# Altium PCB DC-DC switching regulators.PcbDoc
Units mm, origin at the board's own origin, x right, y up, seen from the top; angles counter-clockwise.
Board outline 26 x 20 mm, 3 copper layers (Top Layer, Mid-Layer 1, Bottom Layer); 16 components, 8 nets, 37 pads, 6 vias.
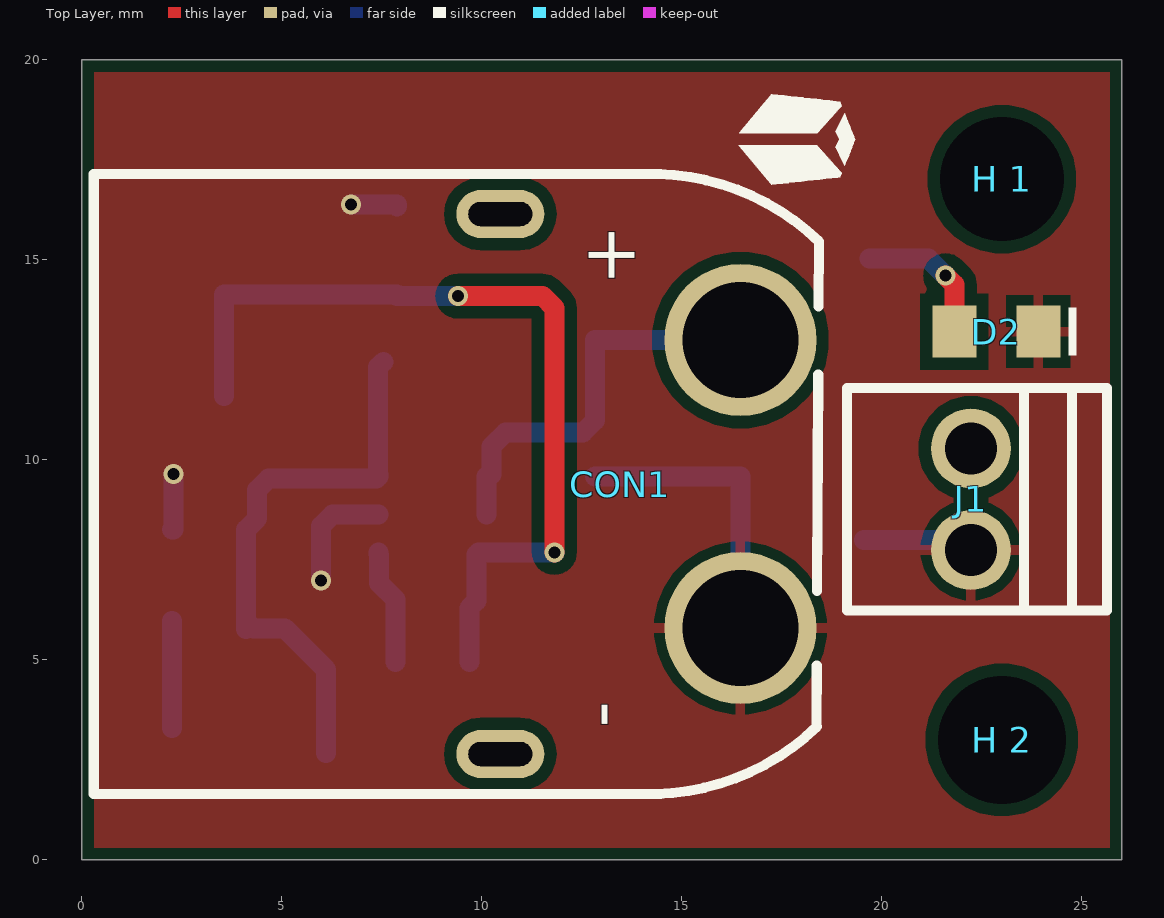
[diagram p0: Top Layer view]
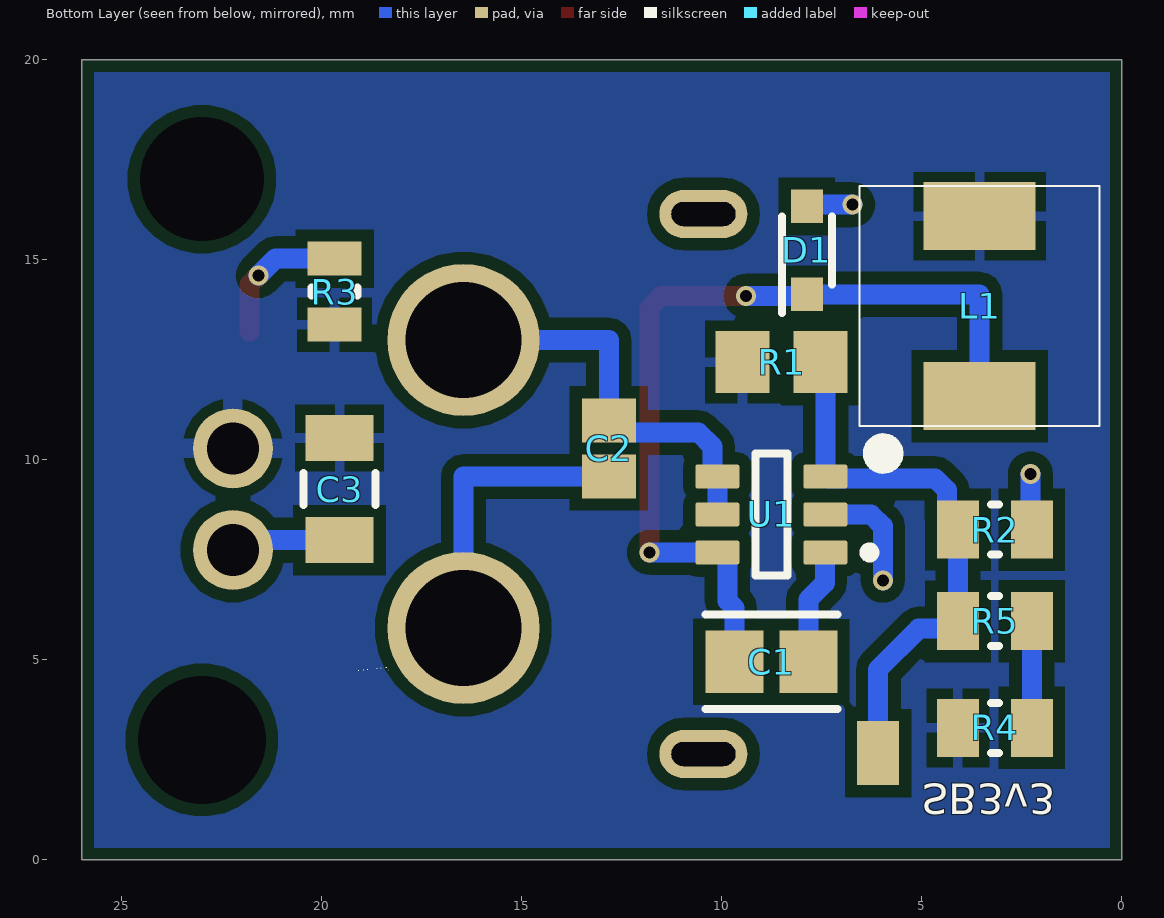
[diagram p1: Bottom Layer view, seen from below]

## Layer stack, top to bottom
Top Solder: solder mask 0.0102, Solder Resist, Dk 3.5
Top Layer: signal copper 0.0356
Dielectric 1: dielectric 0.32, FR-4, Dk 4.8
Mid-Layer 1: signal copper 0.0356
Dielectric2: dielectric 0.32, FR-4, Dk 4.8
Bottom Layer: signal copper 0.0356
Bottom Solder: solder mask 0.0102, Solder Resist, Dk 3.5

## Board outline
0,0 0,20 26,20 26,0

## Design rules (kind name [scope] priority, off if disabled: settings)
BoardOutlineClearance [All] p1: gap=0.3 ignorepadtopadclearanceinfootprint=FALSE
Clearance [All] p1: gap=0.3 ignorepadtopadclearanceinfootprint=TRUE
HoleSize [All] p1: absolutevalues=TRUE maxlimit=6.3 minlimit=0.3 maxpercent=80.000 minpercent=20.000
HoleToHoleClearance [All] p1: gap=0.5 allowstackedmicrovias=TRUE
PolygonConnect [All vs IsNamedPolygon('GND')] p1: thpad.connectstyle=Relief thpad.reliefconductorwidth=0.254 thpad.reliefentries=4 thpad.polygonreliefangle="90 Angle" thpad.airgapwidth=0.254 smdpad.connectstyle=Relief smdpad.reliefconductorwidth=0.254 smdpad.reliefentries=4 smdpad.polygonreliefangle="90 Angle" smdpad.airgapwidth=0.254 via.connectstyle=Direct via.reliefconductorwidth=0.254 via.reliefentries=4 via.polygonreliefangle="90 Angle" via.airgapwidth=0.254
PolygonConnect GND_NET [All vs IsNamedPolygon('Vo+')] p2: thpad.connectstyle=Relief thpad.reliefconductorwidth=0.5 thpad.reliefentries=4 thpad.polygonreliefangle="90 Angle" thpad.airgapwidth=0.254 smdpad.connectstyle=Relief smdpad.reliefconductorwidth=0.254 smdpad.reliefentries=4 smdpad.polygonreliefangle="90 Angle" smdpad.airgapwidth=0.254 via.connectstyle=Direct via.reliefconductorwidth=0.254 via.reliefentries=4 via.polygonreliefangle="90 Angle" via.airgapwidth=0.254
PolygonConnect PolygonConnect_1 [All] p3: connectstyle=Relief reliefconductorwidth=0.254 reliefentries=4 polygonreliefangle="90 Angle" airgapwidth=0.254
RoutingVias [All] p1: holewidth=0.3 width=0.5 viastyle="Through Hole" minholewidth=0.3 minwidth=0.5 maxholewidth=0.3 maxwidth=0.5
SilkToSilkClearance [All] p1 off: silktosilkclearance=0.254
SilkToSolderMaskClearance [IsPad] p1 off: minsilkscreentomaskgap=0.254 clearancetoexposedcopper=TRUE
SolderMaskExpansion [All] p1: expansion=0.102 istentingtop=FALSE
SupplyNets "Schematic Supply Nets" [InNet('GND')] p1: voltage=0.000
Width [All] p1: maxlimit=2.032 minlimit=0.254 preferedwidth=0.762
26 further rules are at their usual default settings.

## Components (designator, comment, footprint, x,y, rotation, side; value= is the part's Value field where it differs from the comment)
C1 "1uF" FP-CL21-IPC_A 8.763,4.953 r0 bottom
C2 "2.2uF" CAPC2013X145X50LL20T25 12.827,10.287 r90 bottom
C3 "4.7uF" FP-GRM31C-0_2-e0_3_0_8-IPC_C 19.558,9.271 r270 bottom
CON1 "XT60PW-M" XT60PW-M 13.462,9.398 r0 top
D1 "60V 1A" SODFL2512X80N 7.874,15.24 r90 bottom
D2 "LED Green" WL-SMCW_0805_150080xx75000 22.86,13.208 r180 top
"H 1" "M3" M3#1 26.19,17.411 r0 top
"H 2" "M3" M3#2 26.19,2.54 r0 top
J1 "CON" XY308-2.54-2P 22.225,9.017 r270 top
L1 "15uH" CMLW6020S150MST 3.556,13.843 r90 bottom
R1 "5.62k" RESC2013X70X40ML20T20 8.509,12.446 r0 bottom
R2 "1.02k" RESC2013X50X30NL20T20 3.175,8.255 r0 bottom
R3 "470" RESC2013X50X30LL20T20 19.685,14.205 r270 bottom
R4 "0Ohm" RESC2013X50X30NL20T20 3.175,3.302 r180 bottom
R5 "1.02k" RESC2013X50X30NL20T20 3.175,5.969 r0 bottom
U1 "LMR14206XMKE/NOPB" FP-DDC0006A-MFG 8.763,8.636 r0 bottom

## Footprints (in the part's own frame and the unit in brackets; to place one, negate y for a bottom-side part, rotate by r counter-clockwise, add the part's x,y. Pads: shape width x height; smd on the part's side, far side on the other; paste and mask are expansions set on the pad)
CAPC2013X145X50LL20T25 [mm] "Chip Capacitor, 2-Leads, Body 2.00x1.25mm, IPC High Density"
  rect 1.1x1.35 smd mask+0: 1(-0.7,0) 2(0.7,0)
  body extent -1.1,-0.72 1.1,0.72, height 1.45
CMLW6020S150MST [mm]
  rect 1.7x2.8 smd: 1(-2.25,0) 2(2.25,0)
  silkscreen extent -4.14,-3 3,3, body extent -3,-3 3,3, height 2
FP-CL21-IPC_A [mm]
  rect 1.455x1.556 smd paste+0 mask+0: 1(-0.926,0) 2(0.926,0)
  silkscreen extent -1.65,-1.18 1.65,1.18, body extent -1,-0.63 1,0.63, height 1.45
FP-DDC0006A-MFG [mm]
  rrect17% 1.1x0.6 smd paste+0 mask+0: 1(-1.35,0.95) 2(-1.35,0) 3(-1.35,-0.95) 4(1.35,-0.95) 5(1.35,0) 6(1.35,0.95)
  silkscreen extent -2.57,-1.53 0.4,1.53, body extent -1.4,-1.45 1.4,1.45, height 1.1
FP-GRM31C-0_2-e0_3_0_8-IPC_C [mm]
  rect 1.155x1.706 smd paste+0 mask+0: 1(-1.276,0) 2(1.276,0)
  silkscreen extent -0.4,-0.9 0.4,0.9, body extent -1.6,-0.8 1.6,0.8, height 1.8
M3#1 [mm] "M3 drill hole"
  round 0 hole 3.1 unplated mask+0: 1(-3.19,-0.393)
M3#2 [mm] "M3 drill hole"
  round 0 hole 3.2 unplated paste+0 mask+0: 1(-3.19,0.46)
RESC2013X50X30LL20T20 [mm] "Chip Resistor, 2-Leads, Body 2.00x1.25mm, IPC High Density"
  rect 0.85x1.35 smd: 1(-0.825,0) 2(0.825,0)
  silkscreen extent -0.1,-0.58 0.1,0.58, body extent -1.1,-0.72 1.1,0.72, height 0.5
RESC2013X50X30NL20T20 [mm] "Chip Resistor, 2-Leads, Body 2.00x1.25mm, IPC Medium Density"
  rect 1.05x1.45 smd: 1(-0.925,0) 2(0.925,0)
  silkscreen extent -0.1,-0.63 0.1,0.63, body extent -1.1,-0.72 1.1,0.72, height 0.5
RESC2013X70X40ML20T20 [mm] "Chip Resistor, 2-Leads, Body 2.00x1.25mm, IPC Low Density"
  rect 1.35x1.55 smd: 1(-0.975,0) 2(0.975,0)
  body extent -1.1,-0.72 1.1,0.72, height 0.7
SODFL2512X80N [mm]
  rect 0.84x0.8 smd: 1(-1.1,0) 2(1.1,0)
  silkscreen extent -1.57,-0.63 0.85,0.63, body extent -1.25,-0.63 1.25,0.62, height 0.71
WL-SMCW_0805_150080xx75000 [mm] "SMD Mono-color Chip LED, body 2.0x1.25mm"
  rect 1.1x1.3 smd: 1(-1.05,0) 2(1.05,0)
  silkscreen extent -2,-0.6 -1.8,0.6, body extent -1,-0.63 1,0.62, height 0.7
XT60PW-M [mm]
  round 3.8 hole 2.9 paste-2539.97 mask+0.05: 1(3,-3.6) 2(3,3.6)
  oval 2.2x1.2 hole 0.6 slot 1.6 at 0 deg paste-2539.97 mask+0.05: 3(-3,6.75) 4(-3,-6.75)
  silkscreen extent -13.17,-7.75 4.96,7.75
XY308-2.54-2P [mm] "1x2P 6A 150V Green 18~26 Straight 2.54mm 1 1 2 Plugin,P=2.54mm Screw terminal ROHS"
  round 2 hole 1.3 paste-2539.97 mask+0.051: 1(-1.27,0) 2(1.27,0)
  silkscreen extent -2.78,-3.1 2.78,3.4

## Part data
C1: library part CMP-13271-003098-1, "50V 1uF X7R ±10% 0805 Multilayer Ceramic Capacitors MLCC - SMD/SMT ROHS", Case Code (Imperial)=0805, Case Code (Metric)=2012, Dielectric=X7R, JLCPCB Part #=C28323, Max Operating Temperature=125°C, Min Operating Temperature=-55°C, Package Quantity=1, Tolerance=10%, Voltage=16V, Capacitance=1uF, Case/Package=0805, ComponentLink1Description=Datasheet, ComponentLink1URL=https://wmsc.lcsc.com/wmsc/upload/file/pdf/v2/lcsc/2304140030_Samsung-Electro-Mechanics-CL21B105KBFNNNE_C28323.pdf, ComponentLink2Description=JCLPCB, ComponentLink2URL=https://jlcpcb.com/partdetail/29074-CL21B105KBFNNNE/C28323, Contact Plating=Tin, Depth=1.25mm, Height=1.25mm, Lead Free="Lead Free", Length=2mm, Mount="Surface Mount", Package=0805, Packaging="Tape and Reel", Radiation Hardening=No, Thickness=0.053inch, Voltage Rating=16V, Voltage Rating (DC)=16V, Width=0.049inch
C2: library part CMP-2007-01169-1, "25V 2.2uF X7R ±10% 0805 Multilayer Ceramic Capacitors MLCC - SMD/SMT ROHS", JLCPCB Part #=C19110, Manufacturer="Samsung Electro-Mechanics", Package=0805, Part Number=C0805C225K4RAC7800, ComponentLink1Description=Datasheet, ComponentLink1URL=https://wmsc.lcsc.com/wmsc/upload/file/pdf/v2/lcsc/2304140030_Samsung-Electro-Mechanics-CL21B225KAFNNNE_C19110.pdf, ComponentLink2Description=JLCPCB, ComponentLink2URL=https://jlcpcb.com/partdetail/19814-CL21B225KAFNNNE/C19110
C3: library part CMP-1037-04923-3, "50V 4.7uF X7R ±10% 1206 Multilayer Ceramic Capacitors MLCC - SMD/SMT ROHS", Case Code (Imperial)=1206, Case Code (Metric)=3216, Dielectric=X7R, JLCPCB Part #=C51205, Max Operating Temperature=125°C, MFR.Part #=CL31B475KBHNNNE, Min Operating Temperature=-55°C, Package Quantity=2000, Tolerance=10%, Voltage=50V, Capacitance=4.7uF, Case/Package=1206, ComponentLink1Description=Datasheet, ComponentLink1URL=https://wmsc.lcsc.com/wmsc/upload/file/pdf/v2/lcsc/2304140030_Samsung-Electro-Mechanics-CL31B475KBHNNNE_C51205.pdf, ComponentLink2Description=JLCPCB, ComponentLink2URL=https://jlcpcb.com/partdetail/52218-CL31B475KBHNNNE/C51205, Depth=1.6mm, Height=1.6mm, Lead Free="Lead Free", Length=3.2mm, Material=Ceramic, Mount="Surface Mount", Package=1206, Packaging="Tape and Reel", Radiation Hardening=No, REACH SVHC="No SVHC", Termination=SMD/SMT, Thickness=0.071inch, Voltage Rating=50V, Voltage Rating (DC)=50V, Width=0.063inch
CON1: "Power Connectors ROHS", JLCPCB Part #=C98732, ComponentLink1Description=JLCPCB, ComponentLink1URL=https://jlcpcb.com/partdetail/Changzhou_AmassElec-XT60PWM/C98732, ComponentLink2Description=Datasheet, ComponentLink2URL=https://wmsc.lcsc.com/wmsc/upload/file/pdf/v2/lcsc/1810251313_Changzhou-Amass-Elec-XT60PW-M_C98732.pdf, MFR.Part #=XT60PW-M
D1: library part BAS16J, "60V Single 700mV@1A 1A SOD-323 Schottky Barrier Diodes (SBD) ROHS", JLCPCB Part #=C7420327, Package=SOD-323, ComponentLink1Description=JCLPCB, ComponentLink1URL=https://jlcpcb.com/partdetail/Hongjiacheng-B16WS/C7420327, ComponentLink2Description=Datasheet, ComponentLink2URL=https://wmsc.lcsc.com/wmsc/upload/file/pdf/v2/lcsc/2308281514_hongjiacheng-B16WS_C7420327.pdf
D2: library part CMP-1426-00009-5, "Emerald 0805 Light Emitting Diodes (LED) ROHS", Case Code (Imperial)=0805, Case Code (Metric)=2012, Color=Green, Forward Current=100mA, Forward Voltage=2V, JLCPCB Part #=C2297, Max Junction Temperature (Tj)=95°C, Max Operating Temperature=85°C, Max Reverse Voltage (DC)=5V, MFR.Part #=KT-0805G, Min Operating Temperature=-40°C, Power Dissipation=72mW, Test Current=20mA, Case/Package=0805, ComponentLink1Description=JLCPCB, ComponentLink1URL=https://jlcpcb.com/partdetail/Hubei_KentoElec-KT0805G/C2297, ComponentLink2Description=datasheet, ComponentLink2URL=https://wmsc.lcsc.com/wmsc/upload/file/pdf/v2/lcsc/1806151820_Hubei-KENTO-Elec-KT-0805G_C2297.pdf, Dominant Wavelength=570nm, Height=700µm, Length=2mm, Lens Style="Clear, Rectangular", Luminous Intensity=40mcd, Mount="Surface Mount", NexarPartId=29717783, Package=0805, Packaging="Tape and Reel", Peak Wavelength=572nm, REACH SVHC=Unknown, Reverse Voltage=5V, RoHS=Compliant, Viewing Angle=140°, Wavelength=570nm, Width=1.25mm
"H 1" "H 2": "M3 drill hole"
J1: library part XY308-2.54-2P, "1x2P 6A 150V Green 18~26 Straight 2.54mm 1 1 2 Plugin,P=2.54mm Screw terminal ROHS", JLCPCB Part #=C557685, ComponentLink1Description=Datasheet, ComponentLink1URL=https://wmsc.lcsc.com/wmsc/upload/file/pdf/v2/lcsc/2304140030_Ningbo-Xinlaiya-Elec--XY308-2-54-2P_C557685.pdf, ComponentLink2Description=JLCPCB, ComponentLink2URL=https://jlcpcb.com/partdetail/Ningbo_Xinlaiya_elec-XY308_2_542P/C557685, MFR.Part #=XY308-2.54-2P
L1: library part CMLW6020S150MST, "1.2A 15uH Shielded Power Inductors ±20% SMD,6x6mm Power Inductors ROHS", JLCPCB Part #=C431352, Package=SMD,6x6mm, ComponentLink1Description="JLCPCB Link", ComponentLink1URL=https://jlcpcb.com/partdetail/Cybermax-CMLW6020S150MST/C431352, ComponentLink2Description=Datasheet, ComponentLink2URL=https://wmsc.lcsc.com/wmsc/upload/file/pdf/v2/lcsc/2304140030_Cybermax-CMLW6020S150MST_C431352.pdf, MFR.Part #=CMLW6020S150MST
R1: library part CMP-2001-00238-1, "125mW Thick Film Resistors ±100ppm/℃ ±1% 5.62kΩ 0805 Chip Resistor - Surface Mount ROHS", JLCPCB Part #=C204581, MFR.Part #=CR0805-FX-5621ELF, Package=0805, ComponentLink1Description=Datasheet, ComponentLink1URL=https://wmsc.lcsc.com/wmsc/upload/file/pdf/v2/lcsc/2304140030_BOURNS-CR0805-FX-5621ELF_C204581.pdf, ComponentLink2Description=JCLPCB, ComponentLink2URL=https://jlcpcb.com/parts/componentSearch?searchTxt=5.62k%20resistor
R2: library part CMP-1013-00511-2, "125mW Thick Film Resistors 150V ±100ppm/℃ ±1% 1.02kΩ 0805 Chip Resistor - Surface Mount ROHS", JLCPCB Part #=C17369, MFR.Part #=0805W8F1021T5E, Package=0805, ComponentLink1Description=Datasheet, ComponentLink1URL=https://wmsc.lcsc.com/wmsc/upload/file/pdf/v2/lcsc/2206010216_UNI-ROYAL-Uniroyal-Elec-0805W8F1021T5E_C17369.pdf, ComponentLink2Description=JLCPCB, ComponentLink2URL=https://jlcpcb.com/partdetail/18057-0805W8F1021T5E/C17369
R3: library part CMP-1013-00511-2, "125mW Thick Film Resistors 150V ±100ppm/℃ ±1% 470Ω 0805 Chip Resistor - Surface Mount ROHS", JLCPCB Part #=C17710, MFR.Part #=0805W8F4700T5E, Package=0805, ComponentLink1Description=Datasheet, ComponentLink1URL=https://wmsc.lcsc.com/wmsc/upload/file/pdf/v2/lcsc/2206010200_UNI-ROYAL-Uniroyal-Elec-0805W8F4700T5E_C17710.pdf, ComponentLink2Description=JLCPCB, ComponentLink2URL=https://jlcpcb.com/parts/componentSearch?searchTxt=470ohm%200805
R4: library part CMP-1013-00511-2, "125mW Thick Film Resistors 150V ±800ppm/℃ ±1% 0Ω 0805  Chip Resistor - Surface Mount ROHS", JLCPCB Part #=C17477, MFR.Part #=0805W8F0000T5E, Package=0805, ComponentLink1Description=Datasheet, ComponentLink1URL=https://wmsc.lcsc.com/wmsc/upload/file/pdf/v2/lcsc/2206010216_UNI-ROYAL-Uniroyal-Elec-0805W8F0000T5E_C17477.pdf, ComponentLink2Description=JLCPCB, ComponentLink2URL=https://jlcpcb.com/partdetail/18165-0805W8F0000T5E/C17477
R5: library part CMP-1013-00511-2, "125mW Thick Film Resistors 150V ±100ppm/℃ ±1% 8.66kΩ 0805  Chip Resistor - Surface Mount ROHS", JLCPCB Part #=C17832, MFR.Part #=0805W8F8661T5E, Package=0805, ComponentLink1Description=Datasheet, ComponentLink1URL=https://wmsc.lcsc.com/wmsc/upload/file/pdf/v2/lcsc/2205311830_UNI-ROYAL-Uniroyal-Elec-0805W8F8661T5E_C17832.pdf, ComponentLink2Description=JLCPCB, ComponentLink2URL=https://jlcpcb.com/parts/componentSearch?searchTxt=0805%20%C2%B11%25%208.66k%CE%A9
U1: library part CMP-04918-000054-1, "IC REG BUCK ADJ 600MA TSOT23-6", JLCPCB Part #=C2071127, Manufacturer="Texas Instruments", Max Junction Temp=+125°C, Max Supply Voltage=42V, Min Supply Voltage=4.5V, Nominal Supply Current=1.3-1.35mA, Output Current=0.6A, Output Voltage=0.765-34V, Package=TSOT-23-6, Switching Frequency=1.25MHz, Temperature="-40°C to +125°C", Temperature Range Low=-40°C, Automotive=No, Category=IC, ComponentLink2Description=Datasheet, ComponentLink2URL=http://www.ti.com/lit/ds/symlink/lmr14206.pdf, ComponentLink3Description=JLCPCB, ComponentLink3URL=https://jlcpcb.com/parts/componentSearch?searchTxt=LMR14206XMKE%2FNOPB, Device Class L1="Integrated Circuits (ICs)", Device Class L2="Power Management ICs", Device Class L3="Voltage Regulators - Switching", Digikey Description="IC REG BUCK ADJ 600MA TSOT23-6", Height=1.1mm, Ipc Land Pattern Name=SOT95P280X110-6, Lead Free=Yes, Manufacturer Part Number=LMR14206XMKE/NOPB, Max Duty Cycle=87%, Mouser Description="Voltage Regulators - Switching Regulators SIMPLE SWITCHER 42 Vin,0.6A SD Vltg Reg", Number Of Outputs=1, Octopart=https://octopart.com/lmr14206xmke%2Fnopb-texas+instruments-24815773, Output Type=AdjustableProgrammable, RoHS=TRUE, Standoff Height=0mm, Switching Topology=Buck, Temperature Range High=+125°C

## Free pads (board coordinates)
  rect 1.05x1.6 smd far side paste+0 mask+0: 2(6.096,2.667)

## Via types
v1: diameter 0.5, hole 0.3, Top Layer to Bottom Layer, 6 vias

## Nets (pads, with @x,y where several pads share a name; then routed paths per layer and width w, separated by ;. In a path a pad name is that pad's centre, name@x,y a point inside that pad or via, vN(x,y) a via of type N, cw(c..) or ccw(c..) an arc to the next point about the centre after c; other vN are vias at no path point)
5vSel: R4.2 R5.1 | length 2.7
  Bottom Layer w0.5: R4.2 R5.1
CB: C1.1 U1.1 | length 2.9
  Bottom Layer w0.5: U1.1 7.413,7.645 7.422,7.636 7.422,6.929 7.837,6.514 C1.1
FB: pad.2 R1.1 R2.2 R5.2 U1.3 | length 14.3
  Bottom Layer w0.5: R5.2@4.1,5.769 R2.2 4.375,8.53 4.375,9.243 4.668,9.536 7.363,9.536 U1.3 7.413,9.63 7.407,9.636 7.407,12.319 R1.1 ; R5.2 4.289,5.78 5.082,5.78 6.096,4.766 pad.2
GND: C2.1 C3.2 CON1.1 D1.2 D2.1 J1.2 R2.1 U1.2 | length 15.9
  Bottom Layer w0.5: R2.1 2.286,8.255 v1(2.286,9.652) ; v1(5.977,6.985) 5.977,8.343 6.27,8.636 U1.2 ; v1(6.731,16.383) 7.874,16.383 D1.2 ; C2.1 16.462,9.587 CON1.1 ; C3.2 22.225,7.995 J1.2
LED_A: D2.2 R3.1 | length 3.6
  Top Layer w0.5: v1(21.59,14.605) 21.81,14.385 D2.2
  Bottom Layer w0.5: R3.1 21.165,15.03 v1(21.59,14.605)
SW: C1.2 D1.1 L1.1 U1.6 | length 21.8
  Top Layer w0.5: v1(9.398,14.097) 11.518,14.097 11.811,13.804 v1(11.811,7.686)
  Bottom Layer w0.5: L1.1 3.556,14.14 D1.1 7.874,14.097 v1(9.398,14.097) ; C1.2 9.689,6.303 9.863,6.477 9.863,7.636 9.913,7.686 U1.6 v1(11.811,7.686)
Vin: C2.2 CON1.2 U1.4 U1.5 | length 10.3
  Bottom Layer w0.5: U1.5 U1.4 10.19,9.586 10.24,9.636 10.24,10.339 10.588,10.687 12.527,10.687 C2.2 12.827,12.998 CON1.2
Vo+: C3.1 J1.1 L1.2 R1.2 R3.2 R4.1
pads on no net: "H 1.1" "H 2.1" CON1.3 CON1.4

## Polygon pours and split planes (outlines as drawn)
Vo+ on Bottom Layer "Vo+" (solid, pour order 3): -0.011,20.104 -0.011,0.104 26,0.104 26,20.104
GND on Top Layer "GND" (solid, pour order 4): 0,0 0,20 26,20 26,0

## Silkscreen, mask and mechanical layers (free items; w line width, h text height)
Top Overlay:
  drawing of 3 lines, arcs and shapes, not listed
Bottom Overlay:
  drawing of 31 lines, arcs and shapes, not listed
  text "SB3v3" at 5.004,1.905 h0.76 r180
Mechanical 1:
  the board outline again, w0.05

## Text inside footprints (layer, text, board x,y; h text height)
CON1: Top Overlay "-" at 13.572,3.302 h1.33 r90; Top Overlay "+" at 13.826,14.351 h1.33 r90